# EAGLE board Glove-WiFi-M0-v0.1 (EAGLE 7.5.0)
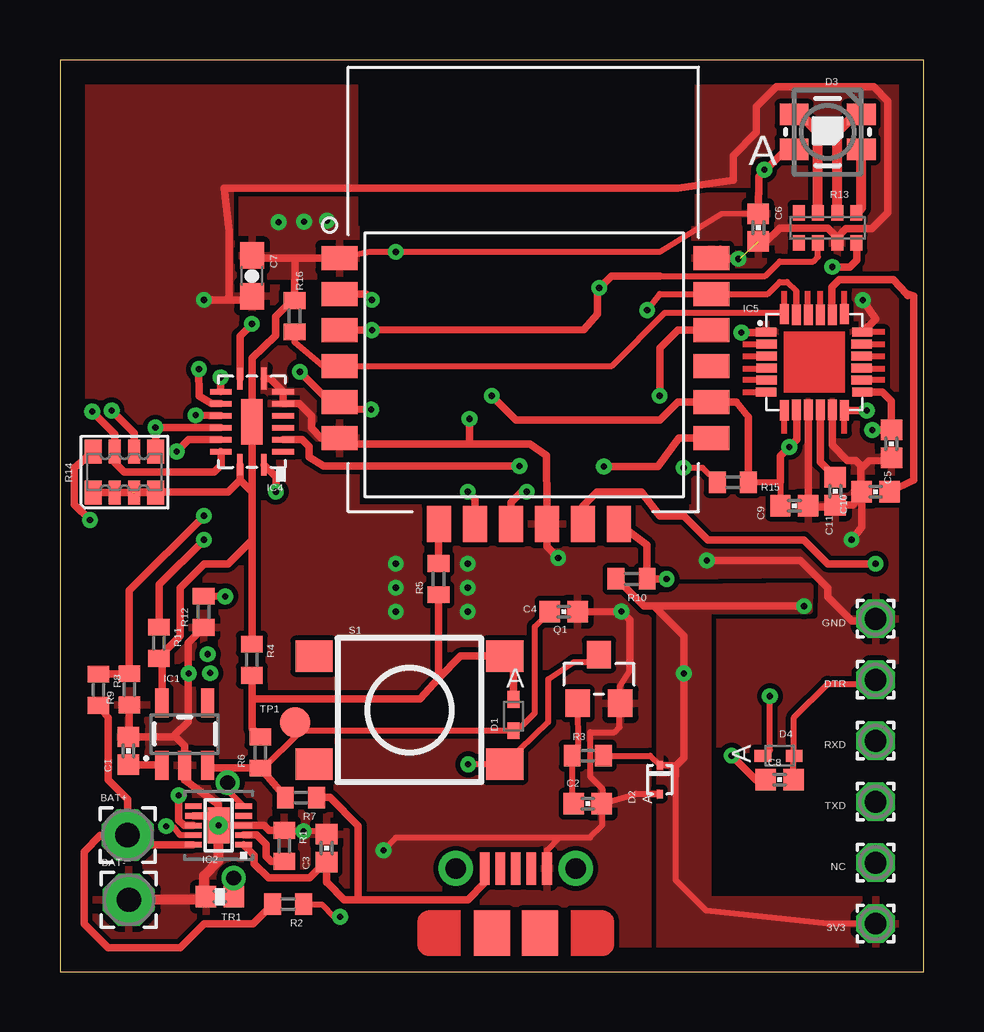
[diagram p0: board, top side]
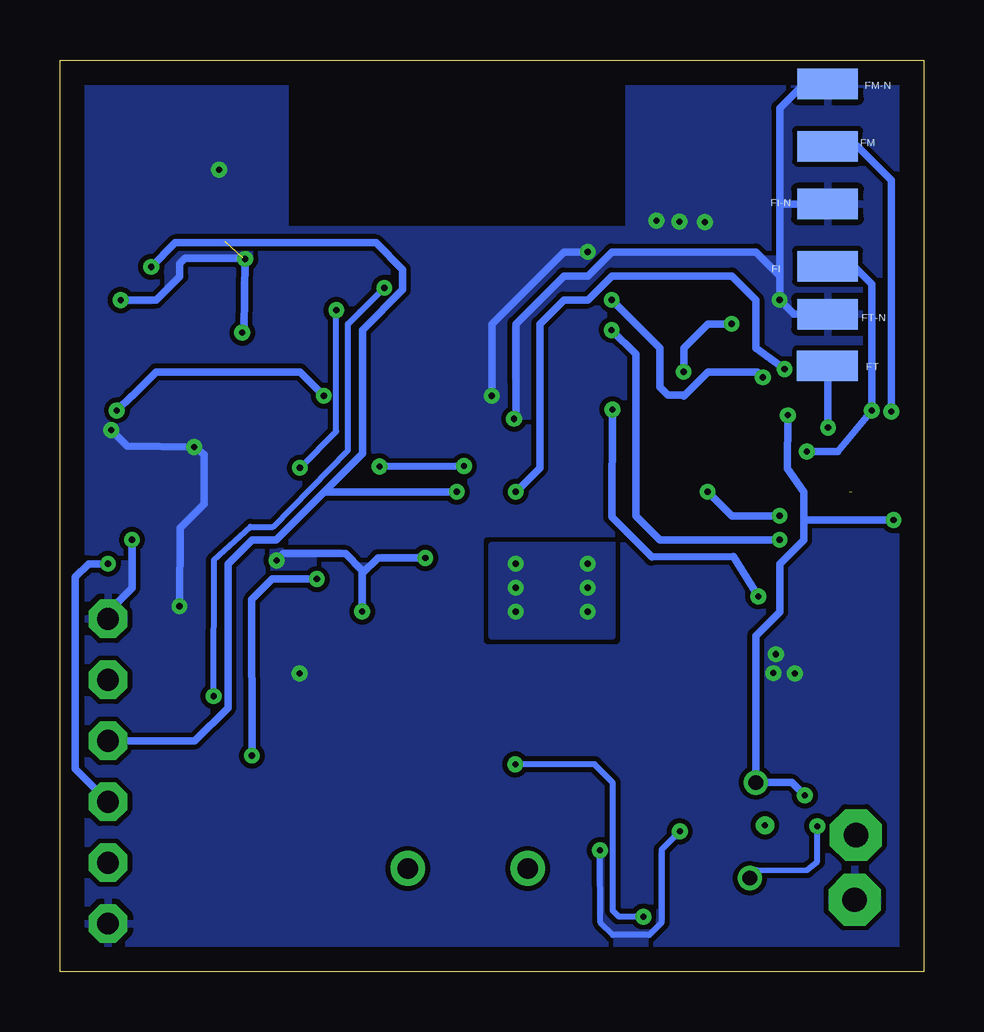
[diagram p1: board, bottom side, seen from below]

Size 36 x 38 mm. Coordinates in mm from the lower left corner, seen from the top.
Outline: 36,0 36,38 0,38 0,0 36,0
Copper layers (1*16): Top 0.035mm / dielectric 1.5mm / Bottom 0.035mm
Design rules "default": minimum track width 10mil, minimum drill 24mil, track to track 8mil, track to pad 8mil, pad to pad 8mil, via to via 8mil, smd to smd 8mil, copper to edge 40mil, drill to drill 8mil, minimum pad ring 10mil, minimum via ring 8mil, stop-mask expansion 4mil, vias tented up to drill 0mil, thermal gap 10mil

## Footprints (pad centres in the part's own frame; a part is rotated, then mirrored left to right if it is on the bottom)
1,6/0,9 = drill 0.914 pad 1.6 octagon: 1 0,0
2,15/1,0 = drill 1.016 pad 2.159 octagon: 1 0,0
0402-CAP = smd 0.85 x 0.9: 1 -0.58,0; 2 0.58,0
0603-CAP = smd 1.1 x 1: 1 -0.85,0; 2 0.85,0
SOD523 = smd 0.7 x 0.5: A 0.7,0; C -0.6,0
SOD-923 = smd 0.36 x 0.25: A -0.6,0; C 0.6,0
LED_RGB = smd 1.2 x 0.9: 1-RED 1.4,-0.725; 2-CA -1.4,-0.725; 3-BL -1.4,0.725; 4-GR 1.4,0.725
FIDUCIAL-1X2 = smd 1 x 1: 1 0,0
SMD1,27-2,54 = smd 1.27 x 2.54: 1 0,0
SOT23-5 = smd 0.55 x 1.2: 1 -0.95,-1.3; 2 0,-1.3; 3 0.95,-1.3; 4 0.95,1.3; 5 -0.95,1.3
BQ24040DSQR = smd 0.7 x 0.23: 1 -1.05,0.8; 2 -1.05,0.4; 3 -1.05,0; 4 -1.05,-0.4; 5 -1.05,-0.8; 6 1.05,-0.8; 7 1.05,-0.4; 8 1.05,0; 9 1.05,0.4; 10 1.05,0.8 | smd 0.914 x 1.499: 11 0,0 | drill 0.254 pad 0.508: V 0,0
WT8266 = smd 1.5 x 1: 1 -7.35,4.75; 2 -7.35,3.25; 3 -7.35,1.75; 4 -7.35,0.25; 5 -7.35,-1.25; 6 -7.35,-2.75; 13 8.15,-2.75; 14 8.15,-1.25; 15 8.15,0.25; 16 8.15,1.75; 17 8.15,3.25; 18 8.15,4.75 | smd 1 x 1.5: 7 -3.2,-6.35; 8 -1.7,-6.35; 9 -0.2,-6.35; 10 1.3,-6.35; 11 2.8,-6.35; 12 4.3,-6.35
DHVQFN16 = smd 0.24 x 0.9: 1 -0.5,1.8; 8 -0.5,-1.8; 9 0.5,-1.8; 16 0.5,1.8 | smd 0.9 x 0.24: 2 -1.3,1.25; 3 -1.3,0.75; 4 -1.3,0.25; 5 -1.3,-0.25; 6 -1.3,-0.75; 7 -1.3,-1.25; 10 1.3,-1.25; 11 1.3,-0.75; 12 1.3,-0.25; 13 1.3,0.25; 14 1.3,0.75; 15 1.3,1.25 | smd 0.9 x 1.9: EPAD 0,0
QFN.24.4X4 = smd 0.85 x 0.38: 1 -2.007,1.25; 2 -1.975,0.75; 3 -1.975,0.25; 4 -1.975,-0.25; 5 -1.975,-0.75; 6 -2.007,-1.25; 13 2.007,-1.25; 14 1.975,-0.75; 15 1.975,-0.25; 16 1.975,0.25; 17 1.975,0.75; 18 2.007,1.25 | smd 0.38 x 0.85: 7 -1.25,-2.007; 8 -0.75,-1.975; 9 -0.25,-1.975; 10 0.25,-1.975; 11 0.75,-1.975; 12 1.25,-2.007; 19 1.25,2.007; 20 0.75,1.975; 21 0.25,1.975; 22 -0.25,1.975; 23 -0.75,1.975; 24 -1.25,2.007
USB-MICRO-MOLEX-105017-0001 = smd 0.4 x 1.35: 1 -1.3,1.3; 2 -0.65,1.3; 3 0,1.3; 4 0.65,1.3; 5 1.3,1.3 | drill 0.85 pad 1.45: G1 -2.5,1.3; G2 2.5,1.3 | smd 1.5 x 1.9: G3 1,-1.4; G4 -1,-1.4
SOT-23 = smd 1.016 x 1.143: 1 -0.889,-1.016; 2 0.889,-1.016; 3 0,1.016
R0402 = smd 0.7 x 0.9: 1 -0.65,0; 2 0.65,0
0603-ARV = smd 0.5 x 0.65: 1 -1.2,-0.625; 2 -0.4,-0.625; 3 0.4,-0.625; 4 1.2,-0.625; 5 1.2,0.625; 6 0.4,0.625; 7 -0.4,0.625; 8 -1.2,0.625
RA1206-8 = smd 0.7 x 1: 1 -1.3,-0.85; 4 1.3,-0.85; 5 1.3,0.85; 8 -1.3,0.85 | smd 0.5 x 1: 2 -0.4,-0.85; 3 0.4,-0.85; 6 0.4,0.85; 7 -0.4,0.85
TACTILE_SWITCH_TALL = smd 1.55 x 1.3: A1 -3.975,-2.25; A2 3.975,-2.25; B1 -3.975,2.25; B2 3.975,2.25
B1,27 = smd 1.27 x 1.27: TP 0,0
0402-RES = smd 0.85 x 0.9: 1 -0.58,0; 2 0.58,0

## Placement (x,y rotation side)
3V3  WIREPAD1,6/0,9  [1,6/0,9]  34,2 180 top
BAT+  WIREPAD2,15/1,0  [2,15/1,0]  2.82,5.69 0 top
BAT-  WIREPAD2,15/1,0  [2,15/1,0]  2.87,2.99 0 top
C1  10uF  [0402-CAP]  2.85,9.2 90 top
C2  10uF  [0402-CAP]  22,7 0 top
C3  0.1uF  [0402-CAP]  11.11,5.14 90 top
C4  10uF  [0402-CAP]  21,15 0 top
C5  0.1uF  [0402-CAP]  34.66,22 270 top
C6  10uF  [0402-CAP]  29.11,31.01 270 top
C7  100u  [0603-CAP]  8,29 270 top
C8  0.1uF  [0402-CAP]  30,8 0 top
C9  10nF  [0402-CAP]  30.61,19.42 0 top
C10  2.2nF  [0402-CAP]  34,20 180 top
C11  0.1uF  [0402-CAP]  32.32,20.02 270 top
D1  PMEG3005EB  [SOD523]  18.9,10.64 90 top
D2  ESD9X5  [SOD-923]  25,8 90 top
D3  [LED_RGB]  32,35 0 top
D4  PMEG3005EB  [SOD523]  30,9 180 top
DTR  WIREPAD1,6/0,9  [1,6/0,9]  34,12.16 180 top
FD1  FIDUCIAL1X2  [FIDUCIAL-1X2]  -62.56,40.88 0 top  (outside the outline)
FD2  FIDUCIAL1X2  [FIDUCIAL-1X2]  -60.02,40.88 0 top  (outside the outline)
FD3  FIDUCIAL1X2  [FIDUCIAL-1X2]  -57.48,40.88 0 top  (outside the outline)
FD4  FIDUCIAL1X2  [FIDUCIAL-1X2]  -65.1,40.88 0 top  (outside the outline)
FD5  FIDUCIAL1X2  [FIDUCIAL-1X2]  -67.64,40.88 0 top  (outside the outline)
FD6  FIDUCIAL1X2  [FIDUCIAL-1X2]  -70.18,40.88 0 top  (outside the outline)
FD7  FIDUCIAL1X2  [FIDUCIAL-1X2]  -72.72,40.88 0 top  (outside the outline)
FD8  FIDUCIAL1X2  [FIDUCIAL-1X2]  -75.26,40.88 0 top  (outside the outline)
FI  WIREPADSMD1,27-254  [SMD1,27-2,54]  4,29.4 90 bottom
FI-N  WIREPADSMD1,27-254  [SMD1,27-2,54]  4,32 90 bottom
FM  WIREPADSMD1,27-254  [SMD1,27-2,54]  4,34.4 90 bottom
FM-N  WIREPADSMD1,27-254  [SMD1,27-2,54]  4,37 90 bottom
FT  WIREPADSMD1,27-254  [SMD1,27-2,54]  4.01,25.26 270 bottom
FT-N  WIREPADSMD1,27-254  [SMD1,27-2,54]  4,27.4 90 bottom
GND  WIREPAD1,6/0,9  [1,6/0,9]  34,14.7 180 top
IC1  AP2112K-3.3V  [SOT23-5]  5.2,9.9 0 top
IC2  BQ24040DSQR_BMS  [BQ24040DSQR]  6.61,6.09 180 top
IC3  WT8266  [WT8266]  19,25 0 top
IC4  74HC4051  [DHVQFN16]  8,22.92 180 top
IC5  MPU-6050  [QFN.24.4X4]  31.44,25.4 0 top
J1  Micro-USB  [USB-MICRO-MOLEX-105017-0001]  19,3 0 top
NC  WIREPAD1,6/0,9  [1,6/0,9]  34,4.54 180 top
Q1  2N7002-NMOS  [SOT-23]  22.47,12.2 0 top
R1  3k  [R0402]  9.35,5.24 270 top
R2  30k  [R0402]  9.51,2.81 180 top
R3  300k  [R0402]  22,9 0 top
R4  300k  [R0402]  8,13 270 top
R5  3k  [R0402]  15.78,16.36 90 top
R6  300k  [R0402]  8.35,9.13 90 top
R7  300k  [R0402]  10.05,7.25 180 top
R8  30k  [R0402]  1.6,11.75 270 top
R9  3k  [R0402]  2.89,11.76 90 top
R10  30k  [R0402]  23.83,16.37 180 top
R11  3k  [R0402]  4.13,13.7 270 top
R12  10k  [R0402]  5.99,15 90 top
R13  330E  [0603-ARV]  32,31 180 top
R14  300k  [RA1206-8]  2.69,20.82 0 top
R15  3k  [R0402]  28.05,20.4 0 top
R16  3k  [R0402]  9.78,27.32 90 top
RXD  WIREPAD1,6/0,9  [1,6/0,9]  34,9.62 180 top
S1  On/Off Sw  [TACTILE_SWITCH_TALL]  14.57,10.9 0 top
TP1  PTR1B1,27  [B1,27]  9.81,10.39 90 top
TR1  10kNTC  [0402-RES]  6.67,3.12 180 top
TXD  WIREPAD1,6/0,9  [1,6/0,9]  34,7.08 180 top

## Library data of the parts
3V3 BAT+ BAT- DTR FI FI-N FM FM-N FT FT-N GND NC RXD TXD = wirepad
C1-C6 C8-C11 = 1_ZeroUI; PROD_ID: CAP-12416
C7 R13 = SparkFun-Passives
D1 D4 = diode
D2 D3 IC3-IC5 J1 TR1 = 1_ZeroUI
FD1-FD8 = SparkFun-Aesthetics
IC1 = SparkFun-PowerIC; PROD_ID: VREG-12457
IC2 = 1_ZeroUI; 3D_LIBRARY_NAME: TI_AllParts_2012-12-25; COPYRIGHT: Copyright (C) 2015 Accelerated Designs. All rights reserved; DATASHEETURL: http://www.ti.com/lit/gpn/BQ24040; FAMILY_NAME: BATTERY CHARGE MANAGEMENT; GENERIC_PART_NUMBER: BQ24040; INDUSTRY_STD_PKG_TYPE: SON; MANUFACTURER: Texas Instruments; MANUFACTURER_PART_NUMBER: BQ24040DSQR; PACKAGE_DESIGNATOR: DSQ; PIN_COUNT: 10; VENDOR: Vendor
Q1 = 1_ZeroUI; MPN: 2N7002,215
R1-R12 R15 R16 = rcl
R14 = Seeed-OPL-Resistor
S1 = 1_ZeroUI; PROD_ID: SWCH-11966
TP1 = testpad

## Nets
3.3V: 3V3.1 C5.1 C6.1 C7.1 C9.1 D2.C D3.2-CA IC1.5 IC3.1 IC3.14 IC4.16 IC4.EPAD IC5.8 IC5.13 R3.2 R4.1 R10.2 R11.2 R14.1 R14.2 R14.3 R14.4 R15.2 R16.2
5V: C3.1 IC2.1 J1.1 R7.1
/POWEROFF_SWINT: IC3.7 R5.2
CHG_ON: IC2.5 IC2.8 IC4.12 R14.8
DTR: C8.2 D4.C DTR.1
GND: BAT-.1 C1.2 C2.2 C3.2 C4.2 C5.2 C6.2 C7.2 C9.2 C10.2 C11.2 D2.A FI-N.1 FM-N.1 FT-N.1 GND.1 IC1.2 IC2.3 IC2.7 IC2.11 IC3.6 IC3.10 IC3.18 IC4.6 IC4.7 IC4.8 IC5.1 IC5.9 IC5.11 IC5.18 J1.5 Q1.2 R1.1 R9.1 R12.1 R13.7 TR1.2
I2C_N: IC3.4 IC5.24 R16.1
I2C_P: IC3.17 IC5.23 R15.1
MPU_INT: IC3.16 IC5.12
MUX_COM: IC3.13 IC4.3
MUX_S0: IC3.8 IC4.11
MUX_S1: IC3.2 IC4.10
MUX_S2: IC3.5 IC4.9 R12.2
N$1: FT.1 IC4.13 R14.5
N$2: C11.1 IC5.10
N$3: C10.1 IC5.20
N$4: FI.1 IC4.14 R14.6
N$5: FM.1 IC4.15 R14.7
N$6: D3.1-RED R13.1
N$7: D3.4-GR R13.2
N$8: D3.3-BL R13.3
N$9: C2.1 Q1.1 R3.1
N$10: IC2.2 R1.2
N$11: Q1.3 R2.1 S1.A2
N$12: D1.A R4.2 R5.1 R6.2 S1.B2
N$13: IC2.9 TR1.1
PROGL/LED-B: D4.A IC3.3 R11.1 R13.6
PWR_EN: C4.1 D1.C IC1.3 R6.1 R7.2 TP1.TP
RST: C8.1 IC3.12 R10.1
RXD/LED-R: IC3.9 R13.8 RXD.1
TXD: IC3.11 TXD.1
V_BATT: BAT+.1 IC2.10 R2.2 R8.2
VBATT_SENSE: IC4.1 R8.1 R9.2
VDD: C1.1 IC1.1

## Tracks (layer width: path | path; a pad name or v marks a point on that pad's centre or on a via)
3.3V  (via drill 0.25)  (1 unrouted)
  Top 0.254: C6.1 27.58,31.58 25,30 v14,30 12.9,30 IC3.1 | R3.2 24.6,9 D2.C 25.69,8.6 25.67,7.62 25.67,3.81 26.94,2.54 32.02,1.98 3V3.1 | R15.2 30.03,20.4 C9.1
  Top 0.305: IC1.5 4.25,12.93 | 4.25,12.93 R11.2 | 8,21.62 IC4.EPAD | 8,20 IC4.EPAD | IC4.16 7.5,20.5 | 7.5,20.5 8,20 | 8,20 8,18 | 8,18 R4.1 | 4.25,12.93 4.25,13.25 5,14 5,16 6,17 7,17 8,18 | D3.2-CA 30.27,34.27 29.14,33.13 C6.1 | IC5.8 30.71,23.41 30.71,22.17 v30.41,21.87 30.03,21.49 30.03,20.4 | R14.1 R14.2 R14.3 R14.4 | 3,20 7,20 7.5,20.5 | C7.1 8.1,29.75 9.8,29.75 | 9.8,29.75 IC3.1 | 9.8,29.75 R16.2 9.63,27.95 8.98,27.3 8.98,26.51 8.02,25.57 IC4.EPAD | IC5.13 34.29,24.15 34.66,23.78 C5.1 34.68,22.57 v33.87,22.57 | R10.2 23.21,16.37 24.34,15.24 24.76,15.24 | 24.76,15.24 26,14 26,8.91 25.69,8.6 | 24.76,15.24 30.24,15.24 v31.02,15.23 | R15.2 28.7,23.11 28.19,23.75 IC3.14 25.75,23.75 25,23 19,23 v18,24
  Bottom 0.305: v31.02,15.23 31,18.48 30,19.48 30,21.55 v30.41,21.87 33.2,21.9 v33.87,22.57 | v18,24 18,27 15,30 v14,30
  other vias: 29.36,33.42 5.36,12.42 6.26,12.44 6.16,13.23 26.01,12.43 9.12,31.24 10.17,31.26 11.13,31.3
  pour Bottom (rank 2): -2,39 37,39 37,-1 -2,-1
  pour Top: 25,1 35,1 35,3 27,3 27,15.06 31.24,15.06 31.27,16.08 24,16 25,15
  pour Top: 7.59,29.46 7.59,32.32 29.47,32.32 29.47,31.1 29.38,31.1 29.38,29 8,29 8,29.45 7.67,29.45
5V
  Top 0.305: IC2.1 8.1,4.85 8.1,4.5 8.7,3.9 10.4,3.9 11.06,4.56 C3.1 11.11,3.73 11.17,3.67 11.85,3 12.43,3 | 12.43,3 17,3 17.7,3.7 J1.1 | R7.1 11.26,7.25 12.43,6.08 12.43,3
/POWEROFF_SWINT
  Top 0.305: R5.2 15.78,18.63 IC3.7
CHG_ON  (via drill 0.25, 0.61)
  Top 0.254: IC2.5 6.99,7.56 v6.99,7.88
  Top 0.305: IC2.8 5.17,6.09 4.95,6.31 v4.95,7.34 | R14.8 0.6,20.99 0.6,19.47 v1.25,18.82 | v5.66,23.19 6.23,23.17 IC4.12
  Bottom 0.305: v4.95,7.34 5.49,7.88 v6.99,7.88 v7,7.89 7,14 6,15 6,17 5,18 5,18.72 | 5,18.72 5,20 5.68,20.97 v5.66,23.19 | v1.25,18.82 4.9,18.82 5,18.72
DTR
  Top 0.254: C8.2 30.58,8.98 D4.C 30.6,10.6 32,12 33.84,12 DTR.1
GND  (via drill 0.25)  (1 unrouted)
  Top 0.254: 27.52,30.12 IC3.18 | 23.76,12.58 23.33,11.88 23.33,11.21 Q1.2 23.31,11.18 | J1.5 20.3,5.06 20.83,5.59 | 20.83,5.59 22.1,5.59 22.61,6.1 22.61,6.97 C2.2 | 23.31,11.18 23.14,11.18 | C2.2 22.61,7.03 22.61,7.62 22.1,8.13 22.1,9.97 23.11,9.97 23.33,10.19 23.31,11.18 | C2.2 24.03,7.41 D2.A | 9.52,5.72 9.63,5.84 v10.16,5.84 11,5.84 C3.2 | v13.49,5.05 14.01,5.59 20.83,5.59
  Top 0.305: IC2.11 6.21,6.49 IC2.7 | IC2.11 IC2.3 8.5,6.1 8.71,5.89 R1.1 9.52,5.72 | 4.8,9.8 5.2,9.4 IC1.2 5.2,7.99 6.59,6.97 6.59,6.11 IC2.11 | 4.8,9.8 4.78,9.78 C1.2 2.89,9.82 R9.1 | 4.8,9.8 4.8,9.88 5.33,10.41 5.33,13.69 R12.1 | v33,18 33.42,18.54 C10.2 | IC5.9 C9.2 31.19,19.36 32.24,19.36 C11.2 33.05,19.44 C10.2 | C6.2 29.42,30.42 30,31 32,31 32.4,30.6 R13.7 32.4,30.59 32.77,30.96 33.84,30.96 34.51,31.63 34.51,36.29 33.92,36.88 29.87,36.88 29.04,36.05 29.04,34.98 28.08,34.02 28.08,32.98 25.75,32.65 6.85,32.65 7.06,30.86 7.06,28.14 6.92,28 | 17,21.99 19.59,21.99 20.29,21.52 20.3,19.3 IC3.10 20.3,17.71 v20.77,17.24 | 17,21.99 11.9,22 IC3.6 10.88,22.25 10.48,22.65 10.48,23.15 9.96,23.67 IC4.6 IC4.7 8.75,24.72 IC4.8 | C4.2 v23.4,15.01 23.75,14.66 23.76,13 23.76,12.58 | 7.85,28.15 C7.2 7.85,28 6.92,28 | v6,28 6.92,28 | C5.2 34.42,21.42 34.46,21.3 33.71,21.29 33.42,21 33.39,21 | IC5.11 32.19,21.94 32.82,21.31 33.18,21.31 33.39,21.1 33.39,21 | 33.39,21 33.39,20.03 C10.2 | v26.97,17.14 30.86,17.14 32,16 32,15.62 33.01,14.61 33.91,14.61 GND.1 | IC5.1 29.41,26.63 v28.4,26.63 | v28.28,29.71 27.62,29.7 27.52,30.12 | IC5.18 34,27.2 v33.47,27.99 | v17.07,23.04 17.07,22.06 17,21.99
  Top 0.406: BAT-.1 5.96,2.99 TR1.2 6,3.21 6,4 6.6,4.6 6.6,4.7 6.61,4.71 IC2.11
  Bottom 0.254: v10.16,5.84 10.92,5.08 10.92,2.03 11.43,1.52 12.95,1.52 13.46,2.03 v13.49,5.05
  Bottom 0.305: GND.1 34,15 33,16 v33,18 | v20.77,17.24 22.75,17.24 23.4,16.59 | 23.4,16.59 v23.4,15.01 | FM-N.1 5,37 6,36 6,32 | 6,32 6,29 | 6,29 v6,28 5.4,27.4 FT-N.1 | FI-N.1 6,32 | 23.4,16.59 23.4,16.72 24.1,17.42 26.69,17.42 v26.97,17.14 | 6,29 7,30 13,30 14,29 15,29 17,27 17,25 16.98,24.54 16.98,23.13 v17.07,23.04 | v28.4,26.63 28.32,26.71 v28.28,29.71 28.37,29.74 30.79,29.74 31.01,29.52 31.01,28.97 31.98,28 v33.47,27.99
  other vias: 14,17 14,16 14,15 17,17 17,16 17,15
  pour Top (rank 3): -3,41 41,41 41,-2 -3,-2
  pour Bottom (rank 3): -1,38 36,38 36,0 -1,0
  pour Bottom: 12.99,17.76 17.99,17.76 18,14 13,14
I2C_N
  Top 0.254: R16.1 9.78,26.25 10.97,25.23 IC3.4 23,25.25 25.21,27.46 30.14,27.46 IC5.24
I2C_P  (via drill 0.25)
  Top 0.254: IC5.23 30.7,28.36 30.31,28.75 30,28.75 29.5,28.25 IC3.17 25.01,28.25 v24.48,27.57 | R15.1 26.8,21 v26,21
  Bottom 0.254: v26,21 24.48,22.52 v24.48,27.57
MPU_INT  (via drill 0.25)
  Top 0.305: IC3.16 25.75,26.75 25,26 v25,24 | v33.63,23.39 IC5.12
  Bottom 0.305: v25,24 26,25 32,25 33,24 33.02,24 v33.63,23.39
MUX_COM  (via drill 0.25)
  Top 0.305: IC3.13 25.8,22.25 24.92,21.05 v22.68,21.05 | v19.16,21.07 17.61,21.07 10.98,21.08 10.39,21.44 10.39,21.88 10.1,22.17 IC4.3
  Bottom 0.305: v22.68,21.05 v19.16,21.07
MUX_S0  (via drill 0.25)
  Top 0.305: IC3.8 17.3,19.7 v17,20 | v5.79,25.11 5.81,24 6.33,23.67 IC4.11
  Bottom 0.305: v17,20 16,21 16,27 15,28 14,28 13,29 8,29 7,28 7,26 v5.79,25.11
MUX_S1  (via drill 0.25)
  Top 0.305: IC4.10 v6.7,24.77 | v13,28 12.75,28.25 IC3.2
  Bottom 0.305: v6.7,24.77 6.93,25 9,25 10,24 10.03,24.03 10.66,24.03 11,24.37 11,26 v13,28
MUX_S2  (via drill 0.25)
  Top 0.305: R12.2 v6.89,15.64 | v12.97,23.43 11.95,23.45 IC3.5 11.4,24 11,24 v10,25 | IC4.9 7.5,26.5 v8,27
  Bottom 0.305: v6.89,15.64 7.93,17.31 11.33,17.28 13,18.95 13,19 v12.97,23.43 | v8,27 9,27 10,26 v10,25
N$1  (via drill 0.25)
  Top 0.305: R14.5 v3.98,22.67 IC4.13
  Bottom 0.305: v3.98,22.67 3.99,24.99 FT.1
N$2
  Top 0.305: IC5.10 31.69,21.23 C11.1
N$3
  Top 0.305: IC5.20 32.17,27.4 32.17,28.53 32.49,28.85 34.73,28.85 35.28,28.25 | 35.28,28.25 35.34,28.18 | C10.1 35.59,20.48 35.59,28.15 35.28,28.25
N$4  (via drill 0.25)
  Top 0.305: R14.6 3.09,22.45 v2.15,23.39 | IC4.14 5.37,22.17 v4.87,21.67
  Bottom 0.305: FI.1 2.89,29.39 2.15,28.65 v2.15,23.39 3.58,21.68 v4.87,21.67
N$5  (via drill 0.25)
  Top 0.305: v1.35,23.34 2.29,22.4 R14.7 2.29,21.21 2.68,20.82 6.43,20.82 6.72,21.11 6.72,21.65 IC4.15
  Bottom 0.305: v1.35,23.34 1.35,33 2.76,34.41 FM.1
N$6
  Top 0.406: R13.1 33.4,31.83 D3.1-RED
N$7
  Top 0.406: R13.2 32.4,35 33.12,35.73 D3.4-GR
N$8
  Top 0.406: R13.3 31.6,35 30.88,35.73 D3.3-BL
N$9
  Top 0.254: Q1.1 21.6,9.34 R3.1 21.35,7.07 C2.1
N$10
  Top 0.305: IC2.2 8.2,5.7 8.6,5.3 8.6,4.8 8.81,4.59 R1.2
N$11  (via drill 0.25)
  Top 0.254: Q1.3 22.15,12.9 21.42,12.9 20.35,12.2 20.35,10.41 S1.A2 v17.03,8.65 v17.02,8.64 | R2.1 10.18,2.79 10.92,2.79 11.43,2.29 v11.68,2.29
  Bottom 0.254: v11.68,2.29 12.7,2.29 12.95,2.54 12.95,7.87 13.72,8.64 v17.02,8.64
N$12
  Top 0.305: R6.2 8,10.13 8.01,11.37 | 8.01,11.37 15.01,11.37 15.78,12.22 | 8.01,11.37 R4.2 | R5.1 15.78,12.22 | D1.A 18.9,12.79 S1.B2 16.71,13.15 15.78,12.22
N$13  (via drill 0.25, 0.61)
  Top 0.254: TR1.1 v7.24,3.89 | v4.43,6.06 4.71,6.05 4.99,5.69 IC2.9
  Bottom 0.254: v7.24,3.89 6.95,4.22 4.85,4.23 4.43,4.58 v4.43,6.06
PROGL/LED-B  (via drill 0.25)
  Top 0.254: 25,29 29.4,29 30,29.6 31.4,29.6 31.6,29.8 R13.6 | D4.A 29.6,9.22 v29.6,11.48
  Top 0.305: IC3.3 v13,26.74 | v13,26.74 21.85,26.76 22.41,27.4 22.41,28.43 v22.48,28.5 22.98,29 25,29 | R11.1 4.13,16.13 v6,18 | v13,26.74 | v13,26.74
  Bottom 0.254: v29.6,11.48 29.58,17.15 28.06,18.54 27.12,18.54 24,21.73 24,27 23.5,27.5 23.48,27.5 v22.48,28.5
  Bottom 0.305: v6,18 11,18 12,19 12,25.74 v13,26.74
PWR_EN
  Top 0.254: 8.4,8.44 8.44,8.44 10,10 10,10.2 TP1.TP 10.16,10.04 D1.C 19.06,10.04 19.79,10.77 19.79,14.37 C4.1
  Top 0.305: R7.2 8.4,8.44 R6.1 6.27,8.48 IC1.3
RST  (via drill 0.25)
  Top 0.305: IC3.12 24.48,17.78 R10.1 v25.29,16.36 | C8.1 29,8 v28,9
  Bottom 0.305: v28,9 28.01,15.51 27.15,16.36 v25.29,16.36
RXD/LED-R  (via drill 0.25)
  Top 0.305: v19.46,20 19.24,20 18.8,19.56 IC3.9 | v32.2,29.38 32.94,29.38 33.21,29.65 33.21,30.37 R13.8
  Bottom 0.305: RXD.1 30.38,9.62 29,11 29,17 28,18 27,18 25,20 24.95,20 | 24.95,20 v19.46,20 | 24.95,20 24.95,20.03 23.38,21.6 23.39,26.75 21.72,28.42 21.72,29.27 22.83,30.38 31.2,30.38 v32.2,29.38
TXD  (via drill 0.25)
  Top 0.305: IC3.11 21.8,19.41 22.39,20 24.23,19.99 25,19 26,19 27,18 31,18 32,17 v34,17
  Bottom 0.305: TXD.1 35.36,8.44 35.36,16.45 34.81,17 v34,17
V_BATT
  Top 0.305: BAT+.1 2.82,7.18 2,8 2.01,10.58 R8.2 | R2.2 8.05,2 6,2 5,1 2,1 1,2 1,5 1.68,5.68 2,5.68 2.01,5.69 BAT+.1 | BAT+.1 3.22,5.29 IC2.10
VBATT_SENSE  (via drill 0.25)
  Top 0.305: R8.1 1.62,12.41 R9.2 2.89,15.89 v6,19 | v9,20 9,20.62 IC4.1
  Bottom 0.305: v6,19 8,19 v9,20
VDD
  Top 0.305: IC1.1 4.23,8.62 C1.1